# Altium PCB PCB_tesis.PcbDoc
Units mil, origin at the board's own origin, x right, y up, seen from the top; angles counter-clockwise.
Board outline 2965 x 2457 mil, 2 copper layers (Top Layer, Bottom Layer); 15 components, 20 nets, 76 pads, 1 vias.
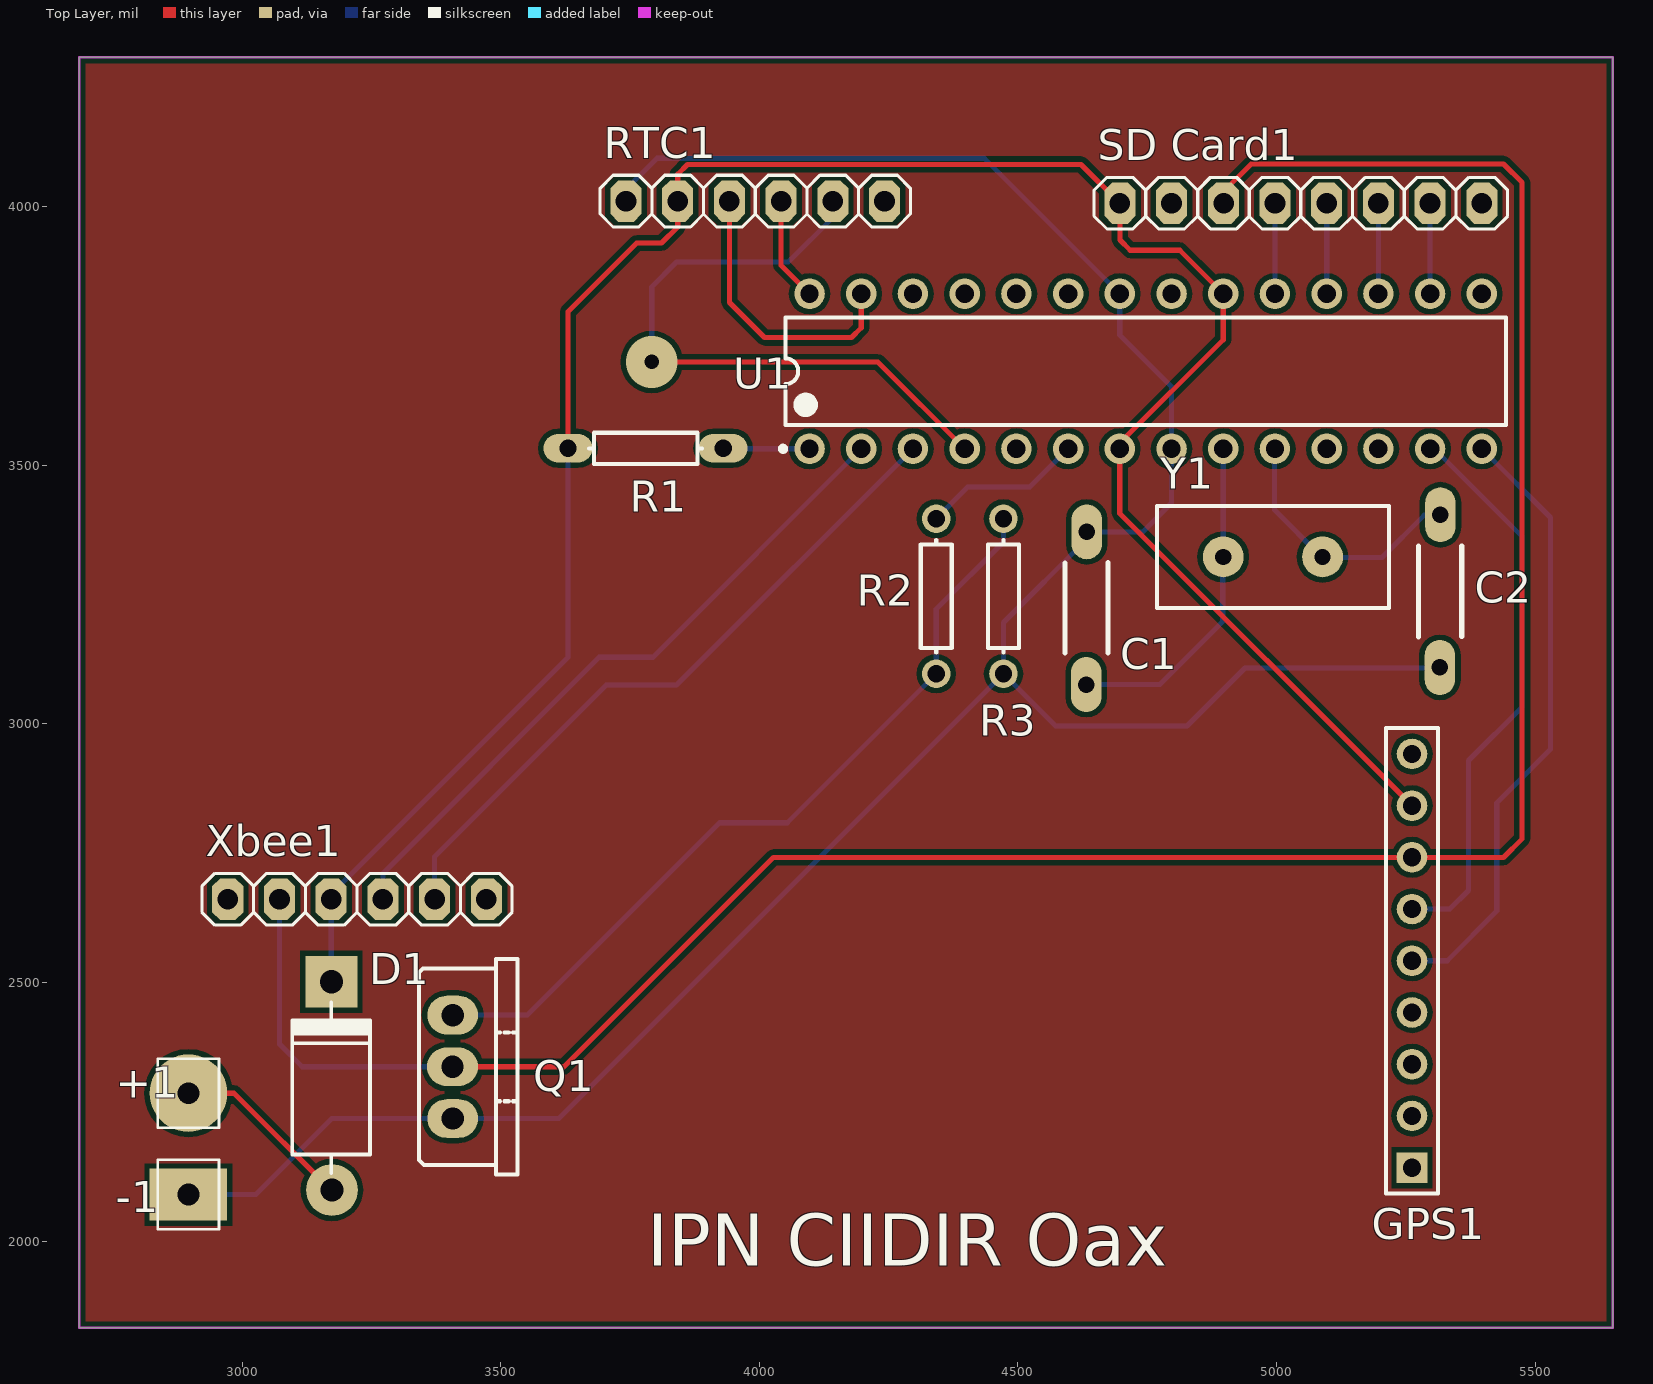
[diagram p0: Top Layer view]
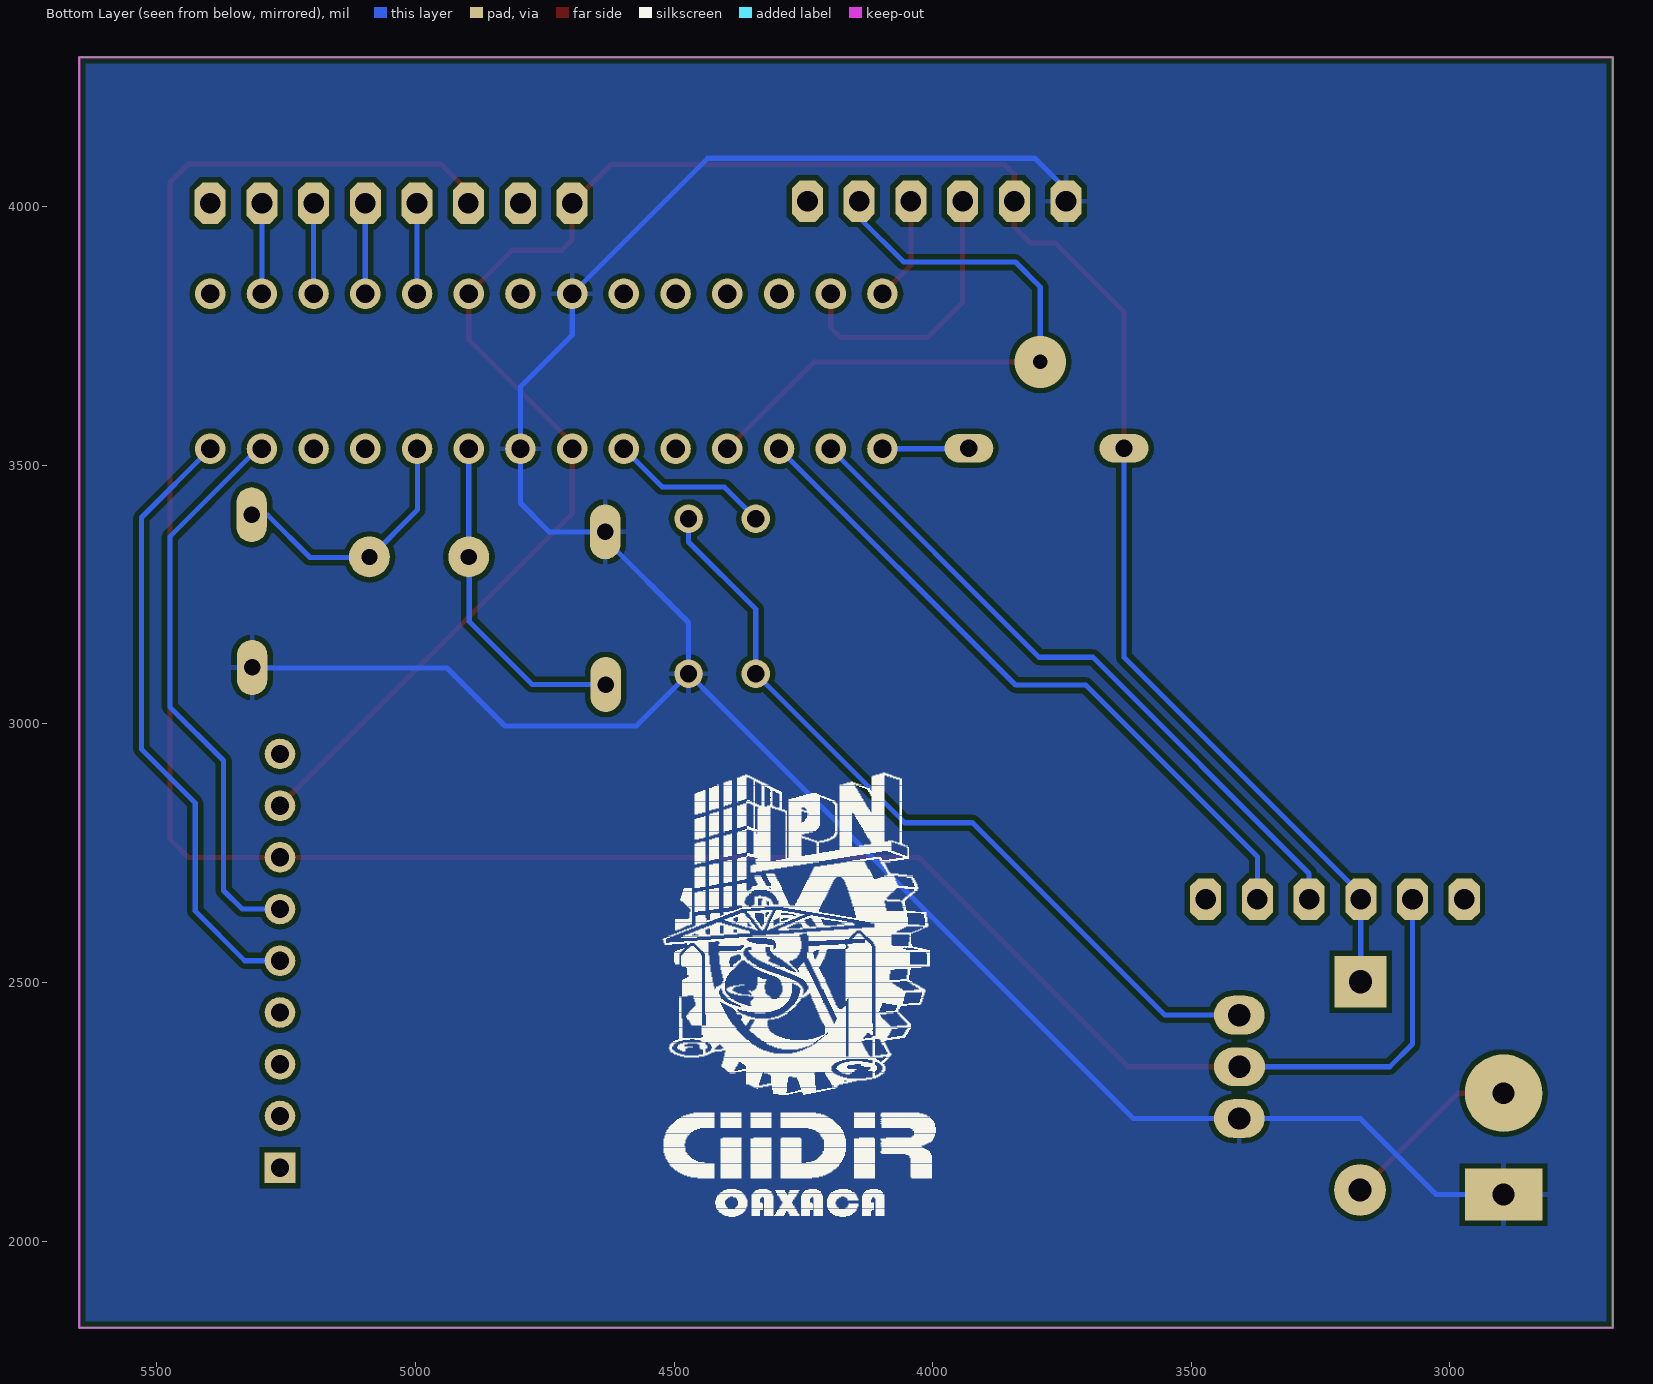
[diagram p1: Bottom Layer view, seen from below]

## Layer stack, top to bottom
Top Solder: solder mask 0.4, Solder Resist, Dk 3.5
Top Layer: signal copper 1.4
Dielectric 1: dielectric 12.6, FR-4, Dk 4.8
Bottom Layer: signal copper 1.4
Bottom Solder: solder mask 0.4, Solder Resist, Dk 3.5

## Board outline
2685,1832 5650,1832 5650,4289 2685,4289

## Design rules (kind name [scope] priority, off if disabled: settings)
Clearance [InPolygon] p1: gap=10
PlaneClearance [All] p1: clearance=2
PlaneConnect [All] p1: planeconnectstyle=Direct reliefexpansion=20 reliefentries=4 reliefconductorwidth=10 reliefairgap=10
PolygonConnect [All] p1: connectstyle=Relief reliefconductorwidth=10 reliefentries=4 polygonreliefangle="90 Angle" airgapwidth=10
RoomDefinition PCB_tesis [InComponentClass('PCB_tesis')] p1: confinementstyle=ConfineIn formatcopy=TRUE lockcomponents=FALSE outline 2685,4289 5650,4289 5650,1832 2685,1832
RoutingVias [All] p1: holewidth=28 width=50 viastyle="Through Hole" minholewidth=28 minwidth=50 maxholewidth=28 maxwidth=50
SolderMaskExpansion [All] p1: expansion=4
Width [All] p1: maxlimit=10 minlimit=10 preferedwidth=10
28 further rules are at their usual default settings.

## Components (designator, comment, footprint, x,y, rotation, side; value= is the part's Value field where it differs from the comment)
+1 "Header 1X1 pin" 1x1POS_HEAD-SOCK_LOWPROF#1 2896,2286 r270 top
-1 "Header 1X1 pin" 1x1POS_HEAD-SOCK_LOWPROF#2 2896,2090 r270 top
C1 "Cap" "Ceramic Capacitor" 4637,3229.68 r90 top
C2 "Cap" "Ceramic Capacitor" 5312,3251 r270 top
D1 "1N4007" D2A 3173,2300 r90 top
GPS1 "Header 1X8 pin" HDR1X9 5262,2142 r90 top
Q1 "TIP31_Flat2" TO-220VS 3406.81,2337 r270 top
R1 "Res1" AXIAL-0.3#1 3780,3533 r180 top
R2 "Res1" AXIAL-0.3#2 4342,3247 r90 top
R3 "Res1" AXIAL-0.3#2 4472,3247 r90 top
RTC1 "Header 1X6 pin" 1x6POS_HEAD_MALE_GRAY 3992,4011 r180 top
"SD Card1" "Header 1X8 pin" 1x8POS_HEAD_MALE_GRAY 5047,4007 r180 top
U1 "ATmega328-PU" 28P3 4747,3682 r90 top
Xbee1 "Header 1X6 pin" 1x6POS_HEAD_MALE_GRAY 3222,2661 r180 top
Y1 "XTAL" HC-49U 4993,3323 r180 top

## Footprints (in the part's own frame and the unit in brackets; to place one, negate y for a bottom-side part, rotate by r counter-clockwise, add the part's x,y. Pads: shape width x height; smd on the part's side, far side on the other; paste and mask are expansions set on the pad)
1x1POS_HEAD-SOCK_LOWPROF#1 [mil] "Connector Socket with header, Single-row 1-position, 0.100\" pitch"
  round 150 hole 42: 1(0,0)
  silkscreen extent -67,-59 67,59, body extent -57,-50 57,50, height 408
1x1POS_HEAD-SOCK_LOWPROF#2 [mil] "Connector Socket with header, Single-row 1-position, 0.100\" pitch"
  rect 100x150 hole 42: 1(0,0)
  silkscreen extent -67,-59 67,59, body extent -57,-50 57,50, height 408
1x6POS_HEAD_MALE_GRAY [mil] "Connector Header, Single-row 6-position, 0.100\" pitch"
  oct 60x80 hole 40: 1(-250,0) 2(-150,0) 3(-50,0) 4(50,0) 5(150,0) 6(250,0)
  silkscreen extent -300,-50 300,50, body extent -300,-48 300,50, height 344
1x8POS_HEAD_MALE_GRAY [mil] "Connector Header, Single-row 8-position, 0.100\" pitch"
  oct 60x80 hole 40: 1(-349.9,0) 2(-249.9,0) 3(-149.9,0) 4(-49.9,0) 5(50.1,0) 6(149.11,0) 7(249.9,0) 8(349.9,0)
  silkscreen extent -400,-50 400,50, body extent -400,-48 400,50, height 344
28P3 [mm] "DIP, 28-Leads, Row Spacing 7.62mm, Pitch 2.54mm, Body 34.67x7.3mm"
  round 1.5 hole 0.9: 1(-3.81,16.51) 2(-3.81,13.97) 3(-3.81,11.43) 4(-3.81,8.89) 5(-3.81,6.35) 6(-3.81,3.81) 7(-3.81,1.27) 8(-3.81,-1.27) 9(-3.81,-3.81) 10(-3.81,-6.35) 11(-3.81,-8.89) 12(-3.81,-11.43) 13(-3.81,-13.97) 14(-3.81,-16.51) 15(3.81,-16.51) 16(3.81,-13.97) 17(3.81,-11.43) 18(3.81,-8.89) 19(3.81,-6.35) 20(3.81,-3.81) 21(3.81,-1.27) 22(3.81,1.27) 23(3.81,3.81) 24(3.81,6.35) 25(3.81,8.89) 26(3.81,11.43) 27(3.81,13.97) 28(3.81,16.51)
  silkscreen extent -3.93,-17.7 2.65,17.93, body extent -3.6,-17.65 3.6,17.65, height 4.58
AXIAL-0.3#1 [mm] "Axial Device, Thru-Hole; 2 Leads; 0.3 in Pin Spacing"
  oval 2.4x1.4 hole 0.85: 1(-3.81,0) 2(3.81,0)
  silkscreen extent -2.77,-0.76 2.77,0.76
AXIAL-0.3#2 [mm] "Axial Device, Thru-Hole; 2 Leads; 0.3 in Pin Spacing"
  round 1.4 hole 0.85: 1(-3.81,0) 2(3.81,0)
  silkscreen extent -2.77,-0.76 2.77,0.76
"Ceramic Capacitor" [mm] "Capacitor ceramico tipo lenteja"
  oval 2.7x1.5 hole 0.813: 1(-3.9,0.125) 2(3.6,0.1)
  silkscreen extent -2.35,-0.95 2.1,1.18, body extent -4.15,-1.05 3.85,1.34, height 9.13
D2A [mil] "Diode 2A, W 150mil, L 450mil"
  round 100 hole 45: 1(-201.3,-0.4)
  rect 100x100 hole 45: 2(201.49,0.59)
  silkscreen extent -169,-74 161,76, body extent -213,-53 217,48, height 100
HC-49U [mm] "HC-49U XTAL"
  round 2 hole 0.8: 1(-2.44,0) 2(2.44,0)
  silkscreen extent -5.7,-2.5 5.7,2.5, body extent -5.52,-2.32 5.53,2.33, height 13.49
HDR1X9 [mm] "Connector; Header; 9 Position"
  rect 1.5x1.5 hole 0.9: 1(0,0)
  round 1.5 hole 0.9: 2(2.54,0) 3(5.08,0) 4(7.62,0) 5(10.16,0) 6(12.7,0) 7(15.24,0) 8(17.78,0) 9(20.32,0)
  silkscreen extent -1.27,-1.27 21.59,1.27
TO-220VS [mm] "TO-220  2.54 pitch"
  oval 1.905x2.5 hole 1.1: 1(-2.54,0.005) 2(0,-0.005) 3(2.54,0.005)
  silkscreen extent -5.29,-1.65 5.29,3.18, body extent -4.95,-1.54 4.95,2.9, height 18.78

## Part data
C1 C2: "Capacitor"
D1: "Diode 1A"
GPS1 "SD Card1": "Header, 1X8-Pin"
Q1: "NPN Epitaxial Silicon Transistor"
R1 R2 R3: "Resistor"
RTC1 Xbee1: "Header, 1X6-Pin"
U1: "8-bit AVR Microcontroller, 32KB Flash, 1KB EEPROM, 2KB SRAM, 28-pin PDIP, Industrial Grade (-40°C to 85°C)"
Y1: "Crystal Oscillator"

## Via types
v1: diameter 100, hole 28, Top Layer to Bottom Layer, 1 vias

## Nets (pads, with @x,y where several pads share a name; then routed paths per layer and width w, separated by ;. In a path a pad name is that pad's centre, name@x,y a point inside that pad or via, vN(x,y) a via of type N, cw(c..) or ccw(c..) an arc to the next point about the centre after c; other vN are vias at no path point)
5V: "SD Card1.8" D1.2 GPS1.8 R1.2 RTC1.5 U1.7 U1.20 Xbee1.4 | length 4410.6
  Top Layer w10: R1.2 3630,3797 3763,3930 3811,3930 3842,3961 3842,4012 3842,4063 3861,4082 4622.1,4082 4697.1,4007 4697.1,3935.9 4717,3916 4813,3916 U1.20 4897,3743 4697,3543 U1.7 4697,3407 GPS1.8
  Bottom Layer w10: D1.2@3173.41,2498.49 3172,2499.89 3172,2662 3172,2671 3630,3129 R1.2 ; U1.20@4872.1,3832 U1.20
CLK: "SD Card1.5" U1.19 | length 174.9
  Bottom Layer w10: U1.19 4997,4006.9
CS: "SD Card1.2" U1.16 | length 174.9
  Bottom Layer w10: U1.16 5297,4006.9
DI: "SD Card1.3" U1.17 | length 175
  Bottom Layer w10: 5196.9,4007 5197,4006.9 U1.17
DO: "SD Card1.4" U1.18 | length 174.9
  Bottom Layer w10: U1.18 5097,4006.9
DRAIN/COLLECTOR: "SD Card1.6" GPS1.7 Q1.2 Xbee1.5 | length 4790.8
  Top Layer w10: Q1.2@3406.81,2337 3622,2337 4027,2742 GPS1.7 5439,2742 5475,2778 5475,4047 5439,4083 4951,4083 4897.89,4029.89 4897.89,4007
  Bottom Layer w10: Xbee1.5@3072,2662 3072,2381 3116,2337 Q1.2@3406.81,2337
ENABLE: R2.2 U1.6 | length 310.9
  Bottom Layer w10: R2.2 4403,3458 4523,3458 U1.6
GND: -1.1 C1.2 C2.2 Q1.3 R3.1 RTC1.6 U1.8 U1.22 | length 5019.3
  Bottom Layer w10: -1.1 3026,2090 3173,2237 3407.19,2237 3612,2237 R3.1 ; RTC1.6@3742,4012 3742,4034 3802,4094 4435,4094 U1.22 4697,3752 4797,3652 U1.8 4797,3427 4741.41,3371.41 C1.2 4633.06,3357.06 4472,3196 R3.1 ; C2.2@5324.94,3108.27 4939.27,3108.27 4827,2996 4573,2996 R3.1
Net+1_1: +1.1 D1.1 | length 354.4
  Top Layer w10: +1.1 2984.11,2286 D1.1@3172.4,2097.7
NetC1_1: C1.1 U1.9 Y1.2 | length 648.8
  Bottom Layer w10: C1.1 4774.13,3076.13 4895.94,3197.94 4895.94,3322 4897,3323.06 U1.9
NetC2_1: C2.1 U1.10 Y1.1 | length 520.2
  Bottom Layer w10: U1.10 4996,3531 4996,3414.06 5088.06,3322 5204,3322 5285.55,3403.55 C2.1@5325.92,3403.55
NetGPS1_5: GPS1.5 U1.14 | length 1195.9
  Bottom Layer w10: GPS1.5 5330,2542 5426,2638 5426,2847 5530,2951 5530,3399 U1.14
NetGPS1_6: GPS1.6 U1.13 | length 1099.4
  Bottom Layer w10: GPS1.6 5335,2642 5371,2678 5371,2929 5475,3033 5475,3362 5305,3532 U1.13
NetQ1_1: Q1.1 R2.1 R3.2 | length 1562
  Bottom Layer w10: Q1.1@3407.19,2437 3551,2437 3923,2809 4054,2809 R2.1 4342,3222 4472,3352 R3.2
NetR1_1: R1.1 U1.1 | length 167.4
  Bottom Layer w10: R1.1 3931,3532 U1.1
"PIN 4 /SQW": RTC1.2 U1.4 | length 1258.1
  Top Layer w10: v1(3792,3700) 4229,3700 U1.4
  Bottom Layer w10: v1(3792,3700) 3792,3845 3840,3893 4056,3893 4142,3979 RTC1.2@4142,4012
"PIN A4 /SDA": RTC1.4 U1.27 | length 554
  Top Layer w10: RTC1.4@3942,4012 3942,3815 4010,3747 4178,3747 4197,3766 U1.27
"PIN A5 /SCL": RTC1.3 U1.28 | length 202.8
  Top Layer w10: RTC1.3@4042,4012 4042,3887 U1.28
RX-TX: U1.2 Xbee1.3 | length 1314.1
  Bottom Layer w10: Xbee1.3@3272,2662 3272,2711 3690,3129 3794,3129 U1.2
TX-RX: U1.3 Xbee1.2 | length 1332.8
  Bottom Layer w10: Xbee1.2@3372,2662 3372,2743 3704,3075 3840,3075 U1.3
pads on no net: "SD Card1.1" "SD Card1.7" GPS1.1 GPS1.2 GPS1.3 GPS1.4 GPS1.9 RTC1.1 U1.5 U1.11 U1.12 U1.15 U1.21 U1.23 U1.24 U1.25 U1.26 Xbee1.1 Xbee1.6

## Polygon pours and split planes (outlines as drawn)
GND on Bottom Layer "Plane Bottom Layer-No Net" (solid, pour order 2): 2685,4289 5650,4289 5650,1832 2685,1832 2685,4289
no net on Top Layer "Plane Bottom Layer-No Net" (solid, pour order 4): 2685,4289 5650,4289 5650,1832 2685,1832 2685,4289

## Keep-outs
Keep-Out Layer:
  the board outline again, w5

## Silkscreen, mask and mechanical layers (free items; w line width, h text height)
Top Overlay:
  text "IPN CIIDIR Oax" at 3783,1952 h100
Bottom Overlay:
  drawing of 3502 lines, arcs and shapes, not listed